# Altium PCB PCB2.PcbDoc (part 2 of 3)
Units mil, origin at the board's own origin, x right, y up, seen from the top; angles counter-clockwise.
Board outline 2598.43 x 2874.02 mil, 2 copper layers (Top Layer, Bottom Layer); 202 components, 116 nets, 598 pads, 319 vias.
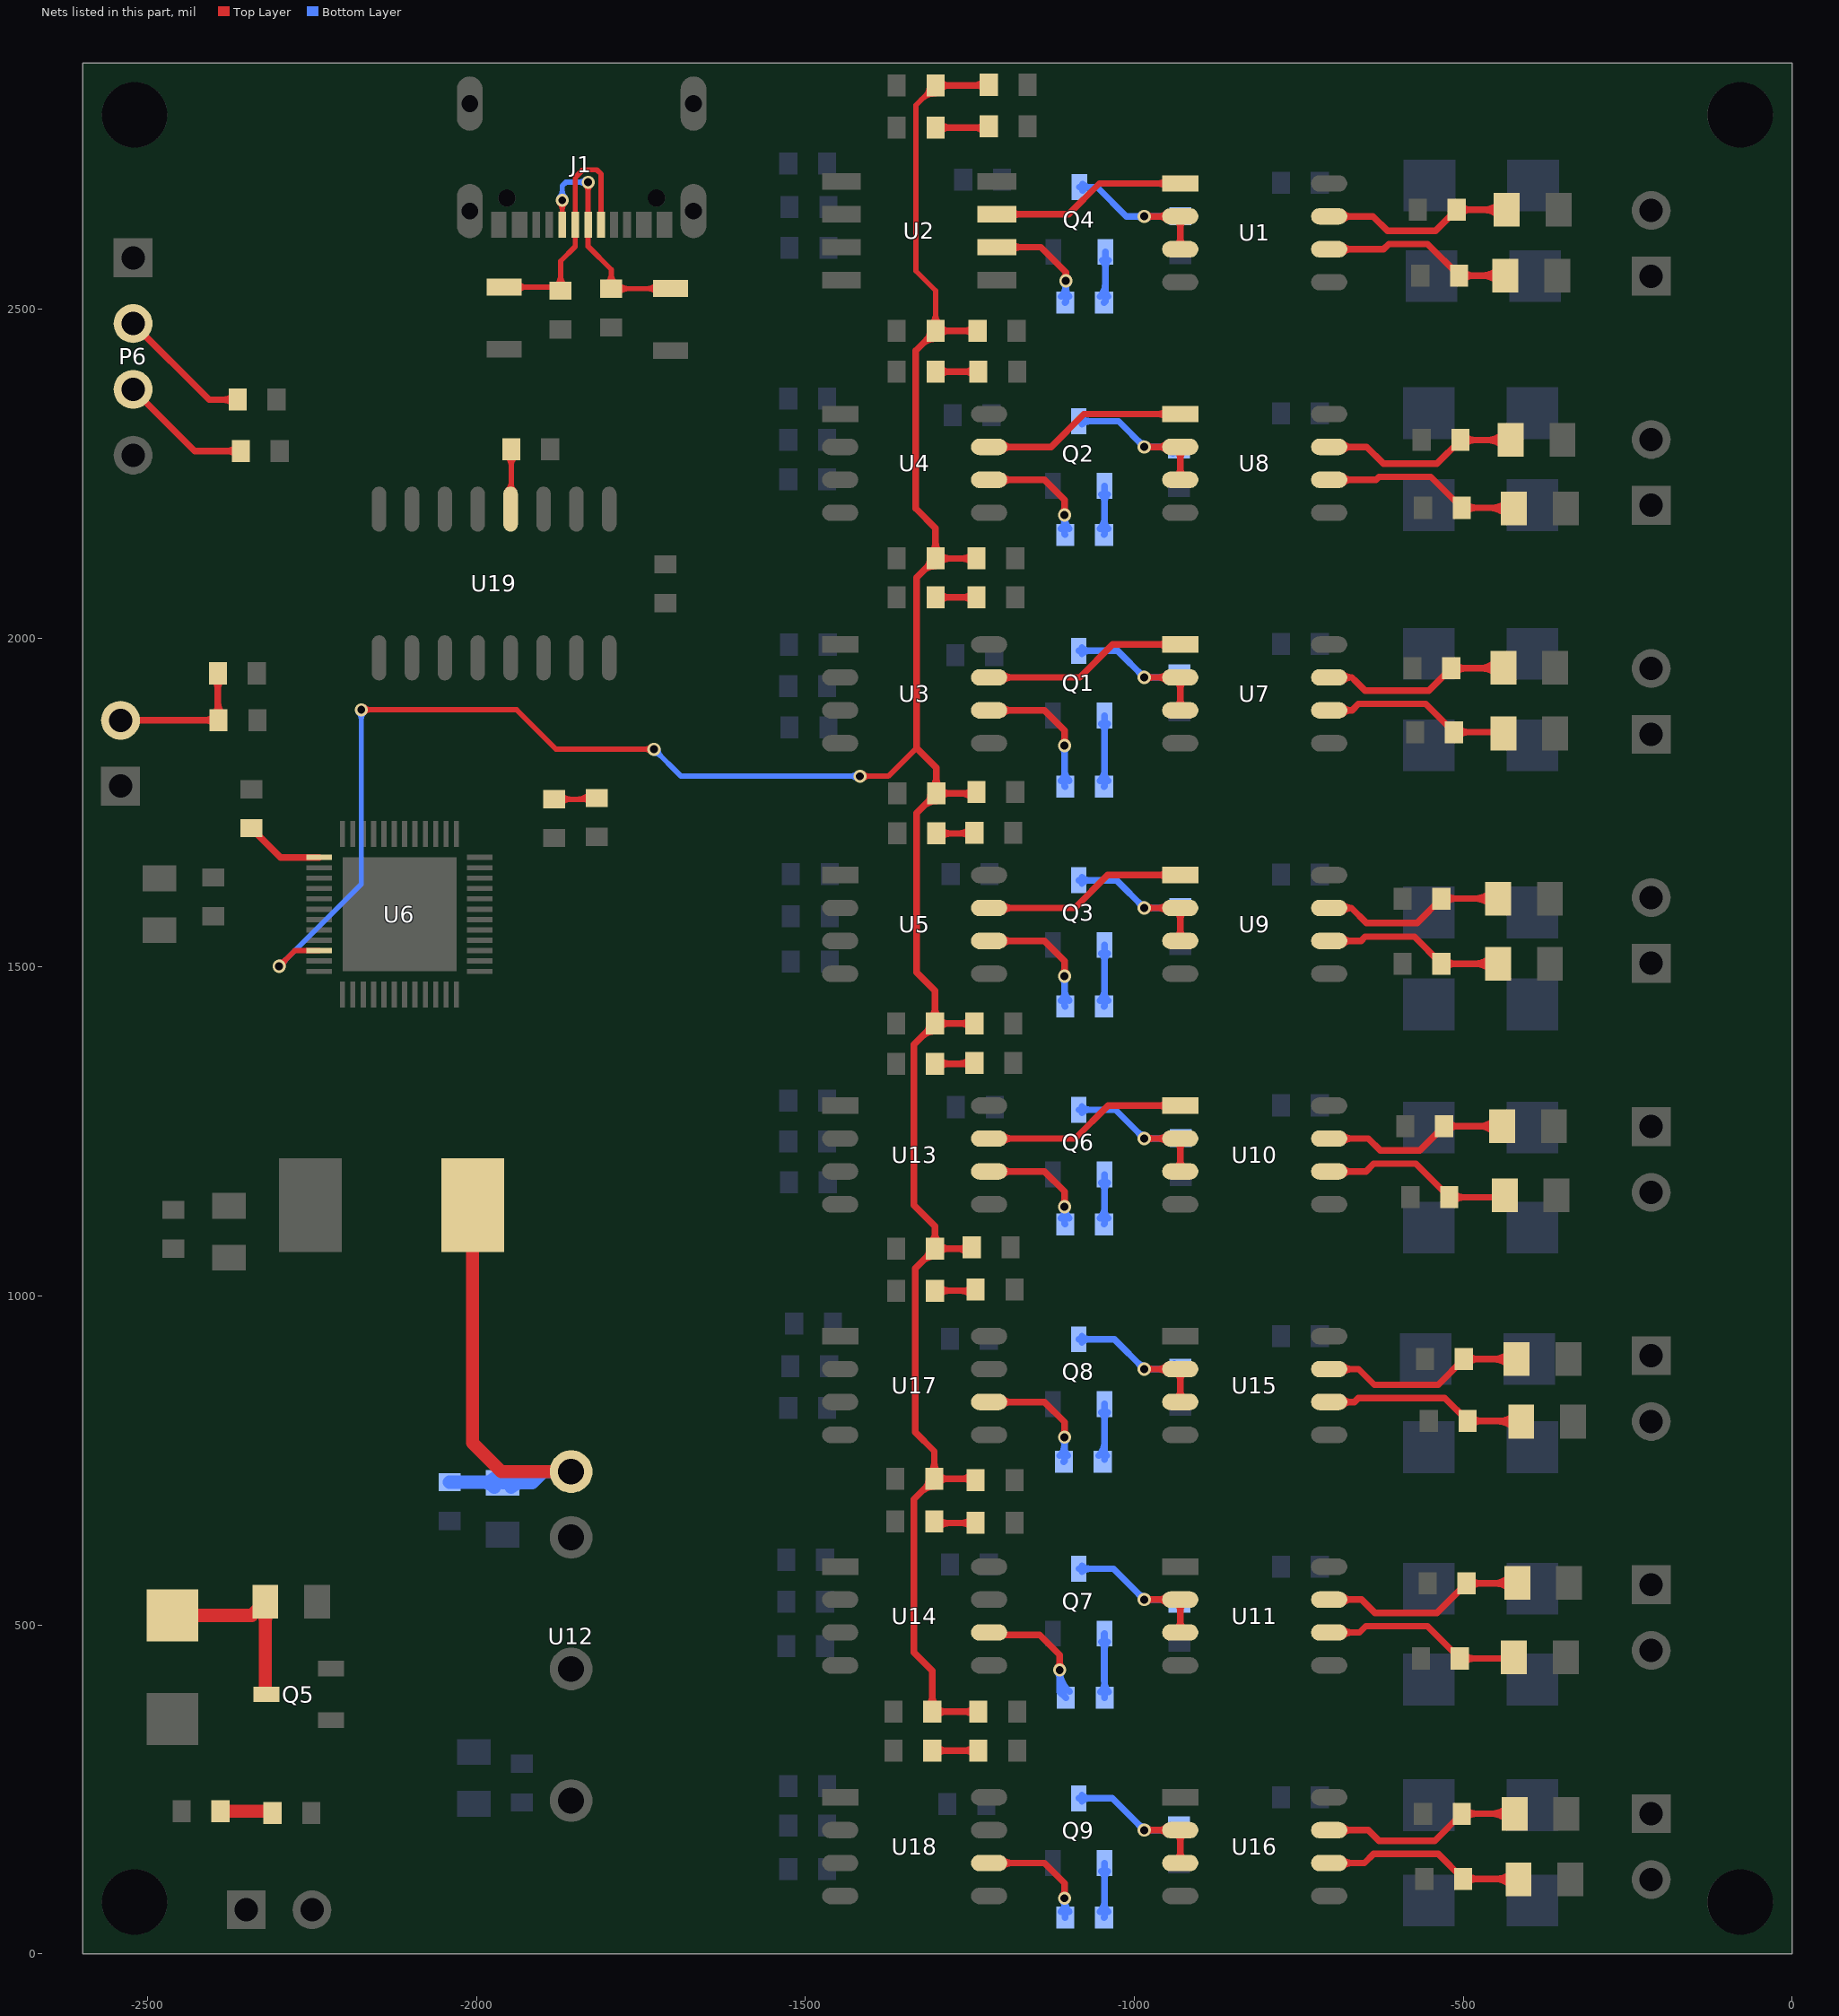
[diagram p2: the nets of this part, all layers, seen from the top]

## Via types
v1: diameter 20, hole 12, Top Layer to Bottom Layer, tented both sides, 315 vias
v2: diameter 30, hole 20, Top Layer to Bottom Layer, tented both sides, 4 vias

## Nets (pads, with @x,y where several pads share a name; then routed paths per layer and width w, separated by ;. In a path a pad name is that pad's centre, name@x,y a point inside that pad or via, vN(x,y) a via of type N, cw(c..) or ccw(c..) an arc to the next point about the centre after c; other vN are vias at no path point) (continued)
INT: LED1.1 LED3.1 LED6.1 LED9.1 LED11.1 LED13.1 LED15.1 LED17.1 R17.1 R20.1 R22.1 R25.1 R54.1 R56.1 R58.1 R60.1 U6.22 | length 5770.2
  Top Layer w8: v1(-2300,1501) -2276.11,1524.89 U6.22@-2239.05,1524.89 ; v1@-2300,1507 ccw(c-2300,1521.49) -2289.76,1511.24 ccw(c-2279.51,1501) v1@-2294,1501 ; v1(-2175,1891) -1939,1891 -1879,1831 v1(-1730,1831) ; v1@-2170.76,1886.76 cw(c-2160.51,1876.51) -2160.51,1891 cw(c-2160.51,1905.49) v1@-2170.76,1895.24 ; v1@-1734.24,1826.76 ccw(c-1744.49,1816.51) -1744.49,1831 ccw(c-1744.49,1845.49) v1@-1734.24,1835.24 ; v1(-1417,1790) -1374,1790 -1331,1833 ; v1@-1412.76,1785.76 cw(c-1402.51,1775.51) -1402.51,1790 cw(c-1402.51,1804.49) v1@-1412.76,1794.24 ; -1323.74,2818.26 cw(c-1302,2796.53) LED9.1@-1302,2827.27 ; -1316.61,2825.39 ccw(c-1328.26,2837.05) LED9.1@-1311.78,2837.05 ; LED1.1@-1308.92,2476.87 ccw(c-1325.61,2493.56) -1302,2493.56 ccw(c-1278.39,2493.56) LED1.1@-1295.08,2476.87 ; LED1.1@-1302,2467 -1302,2528 -1332,2558 -1332,2810 LED9.1@-1302,2840
  Top Layer w10: -1324.03,701.97 cw(c-1304,681.94) LED15.1@-1304,710.27 ; -1323.03,1051.97 cw(c-1303,1031.94) LED13.1@-1303,1060.27 ; -1323.03,1393.97 cw(c-1303,1373.94) LED11.1@-1303,1402.27 ; -1322.03,2100.97 cw(c-1302,2080.94) LED3.1@-1302,2109.27 ; -1322.03,2446.97 cw(c-1302,2426.94) LED1.1@-1302,2455.27 ; -1321.03,1743.97 cw(c-1301,1723.94) LED6.1@-1301,1752.27 ; LED15.1@-1316.9,709.1 ccw(c-1326.85,719.05) LED15.1@-1312.78,719.05 ; LED13.1@-1315.9,1059.1 ccw(c-1325.85,1069.05) LED13.1@-1311.78,1069.05 ; LED11.1@-1315.9,1401.1 ccw(c-1325.85,1411.05) LED11.1@-1311.78,1411.05 ; LED3.1@-1314.9,2108.1 ccw(c-1324.85,2118.05) LED3.1@-1310.78,2118.05 ; LED1.1@-1314.9,2454.1 ccw(c-1324.85,2464.05) LED1.1@-1310.78,2464.05 ; LED6.1@-1313.9,1751.1 ccw(c-1323.85,1761.05) LED6.1@-1309.78,1761.05 ; LED17.1@-1313.21,377.16 ccw(c-1328.2,392.15) -1307,392.15 ccw(c-1285.8,392.15) LED17.1@-1300.79,377.16 ; LED15.1@-1310.21,731.16 ccw(c-1325.2,746.15) -1304,746.15 ccw(c-1282.8,746.15) LED15.1@-1297.79,731.16 ; LED13.1@-1309.21,1081.16 ccw(c-1324.2,1096.15) -1303,1096.15 ccw(c-1281.8,1096.15) LED13.1@-1296.79,1081.16 ; LED11.1@-1309.21,1423.16 ccw(c-1324.2,1438.15) -1303,1438.15 ccw(c-1281.8,1438.15) LED11.1@-1296.79,1423.16 ; LED3.1@-1308.21,2130.16 ccw(c-1323.2,2145.15) -1302,2145.15 ccw(c-1280.8,2145.15) LED3.1@-1295.79,2130.16 ; LED6.1@-1307.21,1773.16 ccw(c-1322.2,1788.15) -1301,1788.15 ccw(c-1279.8,1788.15) LED6.1@-1294.79,1773.16 ; LED9.1@-1302,2840 -1222,2840 R60.1@-1221,2841 ; LED17.1@-1300.79,361.79 cw(c-1285.8,346.8) -1285.8,368 cw(c-1285.8,389.2) LED17.1@-1300.79,374.21 ; LED15.1@-1297.79,715.79 cw(c-1282.8,700.8) -1282.8,722 cw(c-1282.8,743.2) LED15.1@-1297.79,728.21 ; LED13.1@-1296.79,1065.79 cw(c-1281.8,1050.8) -1281.8,1072 cw(c-1281.8,1093.2) LED13.1@-1296.79,1078.21 ; LED11.1@-1296.79,1407.79 cw(c-1281.8,1392.8) -1281.8,1414 cw(c-1281.8,1435.2) LED11.1@-1296.79,1420.21 ; LED3.1@-1295.79,2114.79 cw(c-1280.8,2099.8) -1280.8,2121 cw(c-1280.8,2142.2) LED3.1@-1295.79,2127.21 ; LED1.1@-1295.79,2460.79 cw(c-1280.8,2445.8) -1280.8,2467 cw(c-1280.8,2488.2) LED1.1@-1295.79,2473.21 ; LED9.1@-1295.79,2833.79 cw(c-1280.8,2818.8) -1280.8,2840 cw(c-1280.8,2861.2) LED9.1@-1295.79,2846.21 ; LED6.1@-1294.79,1757.79 cw(c-1279.8,1742.8) -1279.8,1764 cw(c-1279.8,1785.2) LED6.1@-1294.79,1770.21 ; -1270.5,1072 cw(c-1270.5,1047.55) R58.1@-1253.21,1064.84 ; -1265.9,1072 ccw(c-1265.9,1089.94) R58.1@-1253.21,1077.26 ; -1264.5,722 ccw(c-1264.5,746.45) R20.1@-1247.21,729.16 ; -1263.5,1764 cw(c-1263.5,1739.55) R54.1@-1246.21,1756.84 ; -1259.9,722 cw(c-1259.9,704.06) R20.1@-1247.21,716.74 ; -1258.9,1764 ccw(c-1258.9,1781.94) R54.1@-1246.21,1769.26 ; R25.1@-1249.21,1407.79 ccw(c-1264.2,1392.8) -1264.2,1414 ccw(c-1264.2,1435.2) R25.1@-1249.21,1420.21 ; R58.1@-1247,1074 -1249,1072 LED13.1@-1303,1072 ; R17.1@-1246.21,2114.79 ccw(c-1261.2,2099.8) -1261.2,2121 ccw(c-1261.2,2142.2) R17.1@-1246.21,2127.21 ; -1244.61,2840 ccw(c-1244.61,2864.61) R60.1@-1227.21,2847.21 ; R56.1@-1244.21,2460.79 ccw(c-1259.2,2445.8) -1259.2,2467 ccw(c-1259.2,2488.2) R56.1@-1244.21,2473.21 ; R22.1@-1243.21,361.79 ccw(c-1258.2,346.8) -1258.2,368 ccw(c-1258.2,389.2) R22.1@-1243.21,374.21 ; R25.1@-1243,1414 LED11.1@-1303,1414 ; R20.1@-1241,720 -1243,722 LED15.1@-1304,722 ; R54.1@-1240,1766 -1242,1764 LED6.1@-1301,1764 ; R17.1@-1240,2121 LED3.1@-1302,2121 ; -1239.78,2840 cw(c-1239.78,2822.22) R60.1@-1227.21,2834.79 ; R56.1@-1238,2467 LED1.1@-1302,2467 -1332,2437 -1332,2197 -1302,2167 LED3.1@-1302,2121 ; R22.1@-1237,368 LED17.1@-1307,368 -1307,430 -1335,458 -1335,691 LED15.1@-1304,722 ; LED15.1@-1304,722 -1304,764 -1333,793 -1333,1042 LED13.1@-1303,1072 ; LED13.1@-1303,1072 -1303,1106 -1335,1138 -1335,1382 LED11.1@-1303,1414 ; LED11.1@-1303,1414 -1303,1464 -1331,1492 -1331,1734 LED6.1@-1301,1764 ; LED3.1@-1302,2121 -1331,2092 -1331,1833 -1301,1803 LED6.1@-1301,1764
  Bottom Layer w8: v1(-2300,1501) -2175,1626 v1(-2175,1891) ; v1@-2300,1507 ccw(c-2300,1521.49) -2289.76,1511.24 ccw(c-2279.51,1501) v1@-2294,1501 ; v1@-2179.24,1886.76 cw(c-2189.49,1876.51) -2175,1876.51 cw(c-2160.51,1876.51) v1@-2170.76,1886.76 ; v1@-1730,1825 cw(c-1730,1810.51) -1719.76,1820.76 cw(c-1709.51,1831) v1@-1724,1831 ; v1(-1730,1831) -1689,1790 v1(-1417,1790) ; v1@-1421.24,1785.76 ccw(c-1431.49,1775.51) -1431.49,1790 ccw(c-1431.49,1804.49) v1@-1421.24,1794.24
NetC15_2: C15.2 U6.13 | length 132.4
  Top Layer w10: C15.2@-2342,1710.94 -2309.9,1678.84 ; -2302.06,1671 -2309.9,1678.84 ; U6.13@-2239.05,1666.61 -2297.67,1666.61 -2309.9,1678.84
NetC30_1: C30.1 U19.4 | length 155
  Top Layer w8: C30.1@-1953.92,2277.13 cw(c-1970.61,2260.44) -1947,2260.44 cw(c-1923.39,2260.44) C30.1@-1940.08,2277.13 ; U19.4@-1952.97,2224.38 ccw(c-1967.37,2238.79) -1947,2238.79 ; U19.4@-1948,2196.09 -1947,2197.09 C30.1@-1947,2287 ; -1947,2233.96 ccw(c-1933.46,2233.96) U19.4@-1943.03,2224.38
NetC65_1: C65.1 C66.1 L4.2 U12.1 | length 795.1
  Top Layer w20: L4.2@-2005.85,1138 -2005.85,776.85 -1962,733 U12.1@-1856,733
  Bottom Layer w20: C66.1@-2041,717 -1961,717 C65.1@-1960,716 -1915,716 -1898,733 U12.1@-1856,733 ; -1991.7,717 cw(c-1991.7,690.2) C65.1@-1972.75,709.15 ; -1986.87,717 ccw(c-1986.87,736.97) C65.1@-1972.75,722.85 ; C65.1@-1947.25,709.15 cw(c-1930.71,692.62) -1930.71,716 cw(c-1930.71,739.38) C65.1@-1947.25,722.85
NetC67_2: C67.2 R16.1 | length 80.2
  Top Layer w20: R16.1@-2389,217 -2313.06,217 C67.2@-2310.06,214
NetD9_2: D9.2 F2.1 Q5.3 | length 327.5
  Top Layer w20: D9.2@-2462,514.48 -2341.52,514.48 F2.1@-2321,535 -2321,395.94 Q5.3@-2319.43,394.37 ; F2.1@-2327.85,522.25 cw(c-2344.38,505.71) -2321,505.71 cw(c-2297.62,505.71) F2.1@-2314.15,522.25
NetD10_2: D10.2 J1.A7 J1.B7 R33.2 | length 464.2
  Top Layer w8: D10.2@-1958,2533.49 -1877.43,2533.49 R33.2@-1872,2528.06 -1872,2573 -1849.84,2595.16 J1.A7@-1849.84,2628 -1849.84,2700.03 -1838.03,2711.84 -1816.84,2711.84 -1810.47,2705.47 J1.B7@-1810.47,2628 ; D10.2@-1938,2527.27 cw(c-1922.99,2512.25) -1922.99,2533.49 cw(c-1922.99,2554.72) D10.2@-1938,2539.71 ; R33.2@-1878.92,2534.97 ccw(c-1895.61,2551.66) -1872,2551.66 ccw(c-1848.39,2551.66) R33.2@-1865.08,2534.97
NetD11_2: D11.2 J1.A6 J1.B6 R34.2 | length 566.1
  Top Layer w8: v1@-1873.77,2661.23 cw(c-1884.01,2650.99) -1869.53,2650.99 cw(c-1855.04,2650.99) v1@-1865.28,2661.23 ; J1.B6@-1869.53,2628 v1(-1869.53,2665.47) ; v1@-1834.4,2688.6 cw(c-1844.64,2678.36) -1830.16,2678.36 cw(c-1815.67,2678.36) v1@-1825.91,2688.6 ; v1(-1830.16,2692.84) J1.A6@-1830.16,2628 -1830.16,2595.16 -1795,2560 R34.2@-1795,2531.06 -1705.43,2531.06 D11.2@-1705,2531.49 ; R34.2@-1801.92,2537.97 ccw(c-1818.61,2554.66) -1795,2554.66 ccw(c-1771.39,2554.66) R34.2@-1788.08,2537.97 ; R34.2@-1785.13,2524.14 cw(c-1768.44,2507.45) -1768.44,2531.06 cw(c-1768.44,2554.66) R34.2@-1785.13,2537.97 ; -1741.06,2531.06 ccw(c-1741.06,2553.77) D11.2@-1725,2537.71 ; -1738.97,2531.06 cw(c-1738.97,2511.3) D11.2@-1725,2525.27
  Bottom Layer w8: v1@-1873.77,2669.72 ccw(c-1884.01,2679.96) -1869.53,2679.96 ccw(c-1855.04,2679.96) v1@-1865.28,2669.72 ; v1(-1869.53,2665.47) -1869.53,2687.47 -1864.16,2692.84 v1(-1830.16,2692.84) ; v1@-1834.4,2688.6 ccw(c-1844.64,2678.36) -1844.64,2692.84 ccw(c-1844.64,2707.33) v1@-1834.4,2697.09
NetF1_2: F1.2 R19.2 U1.7 | length 409.7
  Top Layer w10: U1.7@-703.62,2641 -637,2641 -615,2619 -541.94,2619 R19.2@-509.94,2651 F1.2@-433.74,2651 ; U1.7@-683.32,2635.7 cw(c-670.52,2622.89) -670.52,2641 cw(c-670.52,2659.11) U1.7@-683.32,2646.3 ; R19.2@-503.74,2644.79 cw(c-488.75,2629.8) -488.75,2651 cw(c-488.75,2672.2) R19.2@-503.74,2657.21 ; F1.2@-444.12,2640.62 ccw(c-469.19,2615.55) -469.19,2651 ccw(c-469.19,2686.45) F1.2@-444.12,2661.38
NetF3_2: F3.2 R1.2 U7.7 | length 403.7
  Top Layer w10: U7.7@-703.62,1940.14 -669.14,1940.14 -663.5,1934.5 -649,1920 -551.94,1920 R1.2@-517.94,1954 F3.2@-439.74,1954 ; U7.7@-683.32,1934.84 cw(c-670.52,1922.04) -670.52,1940.14 cw(c-670.52,1958.25) U7.7@-683.32,1945.45 ; R1.2@-511.74,1947.79 cw(c-496.75,1932.8) -496.75,1954 cw(c-496.75,1975.2) R1.2@-511.74,1960.21 ; -476.61,1954 ccw(c-476.61,1992.87) F3.2@-449.12,1965.38 ; -471.78,1954 cw(c-471.78,1921.96) F3.2@-449.12,1944.62
NetF4_2: F4.2 R6.1 U1.6 | length 408.5
  Top Layer w10: U1.6@-703.62,2591 -621,2591 -613,2599 -554,2599 R6.1@-506,2551 F4.2@-435.74,2551 ; U1.6@-683.32,2585.7 cw(c-670.52,2572.89) -670.52,2591 cw(c-670.52,2609.11) U1.6@-683.32,2596.3 ; R6.1@-499.79,2544.79 cw(c-484.8,2529.8) -484.8,2551 cw(c-484.8,2572.2) R6.1@-499.79,2557.21 ; F4.2@-446.12,2540.62 ccw(c-471.19,2515.55) -471.19,2551 ccw(c-471.19,2586.45) F4.2@-446.12,2561.38
NetF5_2: F5.2 R7.1 U7.6 | length 346.5
  Top Layer w10: U7.6@-703.62,1890.14 -668.86,1890.14 -659,1900 -557,1900 R7.1@-514,1857 F5.2@-440.74,1857 ; U7.6@-683.32,1884.84 cw(c-670.52,1872.04) -670.52,1890.14 cw(c-670.52,1908.25) U7.6@-683.32,1895.45 ; R7.1@-507.79,1850.79 cw(c-492.8,1835.8) -492.8,1857 cw(c-492.8,1878.2) R7.1@-507.79,1863.21
NetF6_2: F6.2 R8.2 U8.7 | length 418.8
  Top Layer w10: U8.7@-703.62,2290.57 -646.57,2290.57 -621,2265 -539.94,2265 R8.2@-503.94,2301 F6.2@-427.74,2301 ; U8.7@-683.32,2285.27 cw(c-670.52,2272.46) -670.52,2290.57 cw(c-670.52,2308.68) U8.7@-683.32,2295.87 ; R8.2@-497.74,2294.79 cw(c-482.75,2279.8) -482.75,2301 cw(c-482.75,2322.2) R8.2@-497.74,2307.21 ; F6.2@-438.12,2290.62 ccw(c-463.19,2265.55) -463.19,2301 ccw(c-463.19,2336.45) F6.2@-438.12,2311.38
NetF7_2: F7.2 R9.2 U9.7 | length 399
  Top Layer w10: U9.7@-703.62,1589.71 -669.71,1589.71 -647,1567 -569.94,1567 R9.2@-532.94,1604 F7.2@-446.74,1604 ; U9.7@-683.32,1584.41 cw(c-670.52,1571.61) -670.52,1589.71 cw(c-670.52,1607.82) U9.7@-683.32,1595.02 ; R9.2@-526.74,1597.79 cw(c-511.75,1582.8) -511.75,1604 cw(c-511.75,1625.2) R9.2@-526.74,1610.21 ; F7.2@-457.12,1593.62 ccw(c-482.19,1568.55) -482.19,1604 ccw(c-482.19,1639.45) F7.2@-457.12,1614.38
NetF8_2: F8.2 R14.1 U8.6 | length 418.6
  Top Layer w10: U8.6@-703.62,2240.57 -632.43,2240.57 -628,2245 -549,2245 R14.1@-502,2198 F8.2@-423.74,2198 ; U8.6@-683.32,2235.27 cw(c-670.52,2222.46) -670.52,2240.57 cw(c-670.52,2258.68) U8.6@-683.32,2245.87 ; R14.1@-495.79,2191.79 cw(c-480.8,2176.8) -480.8,2198 cw(c-480.8,2219.2) R14.1@-495.79,2204.21 ; -460.61,2198 cw(c-460.61,2159.13) F8.2@-433.12,2186.62 ; -455.78,2198 ccw(c-455.78,2230.04) F8.2@-433.12,2207.38
NetF9_2: F9.2 R15.1 U9.6 | length 393.9
  Top Layer w10: U9.6@-703.62,1539.71 -655.29,1539.71 -649,1546 -574,1546 R15.1@-533,1505 F9.2@-446.74,1505 ; U9.6@-683.32,1534.41 cw(c-670.52,1521.61) -670.52,1539.71 cw(c-670.52,1557.82) U9.6@-683.32,1545.02 ; R15.1@-526.79,1498.79 cw(c-511.8,1483.8) -511.8,1505 cw(c-511.8,1526.2) R15.1@-526.79,1511.21 ; F9.2@-457.12,1494.62 ccw(c-482.19,1469.55) -482.19,1505 ccw(c-482.19,1540.45) F9.2@-457.12,1515.38
NetF10_2: F10.2 R37.2 U10.7 | length 403.2
  Top Layer w10: U10.7@-703.62,1239.29 -644.29,1239.29 -626,1221 -565.94,1221 R37.2@-528.94,1258 F10.2@-440.74,1258 ; U10.7@-683.32,1233.98 cw(c-670.52,1221.18) -670.52,1239.29 cw(c-670.52,1257.39) U10.7@-683.32,1244.59 ; R37.2@-522.74,1251.79 cw(c-507.75,1236.8) -507.75,1258 cw(c-507.75,1279.2) R37.2@-522.74,1264.21 ; F10.2@-451.12,1247.62 ccw(c-476.19,1222.55) -476.19,1258 ccw(c-476.19,1293.45) F10.2@-451.12,1268.38
NetF11_2: F11.2 R38.2 U11.7 | length 430.8
  Top Layer w10: U11.7@-703.62,538.43 -654.43,538.43 -634,518 -539.94,518 R38.2@-494.94,563 -418.74,563 F11.2@-417.74,564 ; U11.7@-683.32,533.13 cw(c-670.52,520.32) -670.52,538.43 cw(c-670.52,556.54) U11.7@-683.32,543.73 ; R38.2@-488.74,556.79 cw(c-473.75,541.8) -473.75,563 cw(c-473.75,584.2) R38.2@-488.74,569.21 ; -455.61,563 ccw(c-455.61,601.87) F11.2@-428.12,574.38 ; -450.78,563 cw(c-450.78,530.96) F11.2@-428.12,553.62
NetF12_2: F12.2 R68.1 U10.6 | length 355.8
  Top Layer w10: U10.6@-703.62,1189.29 -647.71,1189.29 -636,1201 -572,1201 R68.1@-521,1150 -439.74,1150 F12.2@-436.74,1153 ; U10.6@-683.32,1183.98 cw(c-670.52,1171.18) -670.52,1189.29 cw(c-670.52,1207.39) U10.6@-683.32,1194.59 ; R68.1@-514.79,1143.79 cw(c-499.8,1128.8) -499.8,1150 cw(c-499.8,1171.2) R68.1@-514.79,1156.21
NetF13_2: F13.2 R44.1 U11.6 | length 367.7
  Top Layer w10: U11.6@-703.62,488.43 -657.57,488.43 -648,498 -554,498 R44.1@-505,449 -424.74,449 F13.2@-422.74,451 ; U11.6@-683.32,483.13 cw(c-670.52,470.32) -670.52,488.43 cw(c-670.52,506.54) U11.6@-683.32,493.73 ; R44.1@-498.79,442.79 cw(c-483.8,427.8) -483.8,449 cw(c-483.8,470.2) R44.1@-498.79,455.21
NetF14_2: F14.2 R45.2 U15.7 | length 428.3
  Top Layer w10: U15.7@-703.62,888.86 -658.86,888.86 -635,865 -537.94,865 R45.2@-498.94,904 F14.2@-418.74,904 ; U15.7@-683.32,883.55 cw(c-670.52,870.75) -670.52,888.86 cw(c-670.52,906.96) U15.7@-683.32,894.16 ; R45.2@-492.74,897.79 cw(c-477.75,882.8) -477.75,904 cw(c-477.75,925.2) R45.2@-492.74,910.21 ; F14.2@-429.12,893.62 ccw(c-454.19,868.55) -454.19,904 ccw(c-454.19,939.45) F14.2@-429.12,914.38
NetF15_2: F15.2 R46.2 U16.7 | length 422.9
  Top Layer w10: U16.7@-703.62,188 -644,188 -628,172 -542.94,172 R46.2@-501.94,213 F15.2@-421.74,213 ; U16.7@-683.32,182.7 cw(c-670.52,169.89) -670.52,188 cw(c-670.52,206.11) U16.7@-683.32,193.3 ; R46.2@-495.74,206.79 cw(c-480.75,191.8) -480.75,213 cw(c-480.75,234.2) R46.2@-495.74,219.21 ; F15.2@-432.12,202.62 ccw(c-457.19,177.55) -457.19,213 ccw(c-457.19,248.45) F15.2@-432.12,223.38
NetF16_2: F16.2 R51.1 U15.6 | length 426.8
  Top Layer w10: U15.6@-703.62,838.86 -665.14,838.86 -659,845 -528,845 R51.1@-493,810 -412.74,810 F16.2@-411.74,809 ; U15.6@-683.32,833.55 cw(c-670.52,820.75) -670.52,838.86 cw(c-670.52,856.96) U15.6@-683.32,844.16 ; R51.1@-486.79,803.79 cw(c-471.8,788.8) -471.8,810 cw(c-471.8,831.2) R51.1@-486.79,816.21 ; -449.61,810 cw(c-449.61,771.13) F16.2@-422.12,798.62 ; -444.78,810 ccw(c-444.78,842.04) F16.2@-422.12,819.38
NetF17_2: F17.2 R52.1 U16.6 | length 427.3
  Top Layer w10: U16.6@-703.62,138 -650,138 -636,152 -538,152 R52.1@-500,114 -416.74,114 F17.2@-415.74,113 ; U16.6@-683.32,132.7 cw(c-670.52,119.89) -670.52,138 cw(c-670.52,156.11) U16.6@-683.32,143.3 ; R52.1@-493.79,107.79 cw(c-478.8,92.8) -478.8,114 cw(c-478.8,135.2) R52.1@-493.79,120.21 ; -453.61,114 cw(c-453.61,75.13) F17.2@-426.12,102.62 ; -448.78,114 ccw(c-448.78,146.04) F17.2@-426.12,123.38
NetLED2_1: LED2.1 R18.1 | length 131.6
  Top Layer w10: LED2.1@-1302,2405 R18.1@-1237,2405 ; LED2.1@-1295.79,2398.79 cw(c-1280.8,2383.8) -1280.8,2405 cw(c-1280.8,2426.2) LED2.1@-1295.79,2411.21 ; R18.1@-1243.21,2398.79 ccw(c-1258.2,2383.8) -1258.2,2405 ccw(c-1258.2,2426.2) R18.1@-1243.21,2411.21
NetLED4_1: LED4.1 R21.1 | length 128.6
  Top Layer w10: LED4.1@-1302,2062 R21.1@-1240,2062 ; LED4.1@-1295.79,2055.79 cw(c-1280.8,2040.8) -1280.8,2062 cw(c-1280.8,2083.2) LED4.1@-1295.79,2068.21 ; R21.1@-1246.21,2055.79 ccw(c-1261.2,2040.8) -1261.2,2062 ccw(c-1261.2,2083.2) R21.1@-1246.21,2068.21
NetLED5_1: LED5.1 R27.1 | length 148.4
  Top Layer w10: LED5.1@-1302,2776 -1223,2776 R27.1@-1221,2778 ; LED5.1@-1295.79,2769.79 cw(c-1280.8,2754.8) -1280.8,2776 cw(c-1280.8,2797.2) LED5.1@-1295.79,2782.21 ; -1244.5,2776 cw(c-1244.5,2751.55) R27.1@-1227.21,2768.84 ; -1239.9,2776 ccw(c-1239.9,2793.94) R27.1@-1227.21,2781.26
NetLED7_1: LED7.1 R23.1 | length 125
  Top Layer w10: LED7.1@-1301,1703 -1244,1703 R23.1@-1243,1704 ; LED7.1@-1294.79,1696.79 cw(c-1279.8,1681.8) -1279.8,1703 cw(c-1279.8,1724.2) LED7.1@-1294.79,1709.21 ; -1266.61,1703 ccw(c-1266.61,1727.61) R23.1@-1249.21,1710.21 ; -1261.78,1703 cw(c-1261.78,1685.22) R23.1@-1249.21,1697.79
NetLED8_1: LED8.1 R24.1 | length 140
  Top Layer w8: LED8.1@-1882,1755 -1819,1755 R24.1@-1817,1757 ; LED8.1@-1872.13,1748.08 cw(c-1855.44,1731.39) -1855.44,1755 cw(c-1855.44,1778.61) LED8.1@-1872.13,1761.92 ; -1848.39,1755 ccw(c-1848.39,1785.44) R24.1@-1826.87,1763.92 ; -1838.73,1755 cw(c-1838.73,1738.22) R24.1@-1826.87,1750.08
NetLED10_1: LED10.1 R53.1 | length 127
  Top Layer w10: LED10.1@-1303,1353 -1244,1353 R53.1@-1243,1354 ; LED10.1@-1296.79,1346.79 cw(c-1281.8,1331.8) -1281.8,1353 cw(c-1281.8,1374.2) LED10.1@-1296.79,1359.21 ; -1266.61,1353 ccw(c-1266.61,1377.61) R53.1@-1249.21,1360.21 ; -1261.78,1353 cw(c-1261.78,1335.22) R53.1@-1249.21,1347.79
NetLED12_1: LED12.1 R55.1 | length 129.4
  Top Layer w10: LED12.1@-1303,1008 -1243,1008 R55.1@-1241,1010 ; LED12.1@-1296.79,1001.79 cw(c-1281.8,986.8) -1281.8,1008 cw(c-1281.8,1029.2) LED12.1@-1296.79,1014.21 ; -1264.5,1008 cw(c-1264.5,983.55) R55.1@-1247.21,1000.84 ; -1259.9,1008 ccw(c-1259.9,1025.94) R55.1@-1247.21,1013.26
NetLED14_1: LED14.1 R57.1 | length 130.4
  Top Layer w10: LED14.1@-1304,657 -1302,655 R57.1@-1241,655 ; LED14.1@-1297.79,647.84 cw(c-1280.5,630.55) -1280.5,655 ; LED14.1@-1297.79,660.26 ccw(c-1285.1,672.94) -1285.1,655 ; R57.1@-1247.21,648.79 ccw(c-1262.2,633.8) -1262.2,655 ccw(c-1262.2,676.2) R57.1@-1247.21,661.21
NetLED16_1: LED16.1 R59.1 | length 136.6
  Top Layer w10: LED16.1@-1307,309 R59.1@-1237,309 ; LED16.1@-1300.79,302.79 cw(c-1285.8,287.8) -1285.8,309 cw(c-1285.8,330.2) LED16.1@-1300.79,315.21 ; R59.1@-1243.21,302.79 ccw(c-1258.2,287.8) -1258.2,309 ccw(c-1258.2,330.2) R59.1@-1243.21,315.21
NetP6_2: P6.2 R35.2 | length 240.1
  Top Layer w10: P6.2@-2522,2478 -2406.35,2362.35 R35.2@-2363.06,2362.35 ; R35.2@-2369.26,2356.14 ccw(c-2384.25,2341.15) -2384.25,2362.35 ccw(c-2384.25,2383.54) R35.2@-2369.26,2368.55
NetP6_3: P6.3 R36.2 | length 236
  Top Layer w10: P6.3@-2522,2378 -2428.35,2284.35 R36.2@-2358.06,2284.35 ; R36.2@-2364.26,2278.14 ccw(c-2379.25,2263.15) -2379.25,2284.35 ccw(c-2379.25,2305.54) R36.2@-2364.26,2290.55
NetP7_2: P7.2 R29.2 R32.1 | length 320.7
  Top Layer w10: P7.2@-2541,1875 R32.1@-2392.35,1875 ; -2414.03,1875 ccw(c-2414.03,1897.38) R32.1@-2398.21,1881.55 ; -2412.36,1875 cw(c-2412.36,1854.99) R32.1@-2398.21,1869.14 ; R29.2@-2399.26,1937.19 cw(c-2414.25,1922.2) -2393.06,1922.2 cw(c-2371.86,1922.2) R29.2@-2386.85,1937.19 ; R32.1@-2398.21,1884.51 ccw(c-2410.65,1896.95) -2393.06,1896.95 ; -2393.06,1902.04 ccw(c-2368.26,1902.04) R32.1@-2385.79,1884.51 ; R29.2@-2393.06,1946.35 -2393.06,1875.71 R32.1@-2392.35,1875 ; R32.1@-2392,1875.35 R32.1@-2392.35,1875
NetQ1_1: Q1.1 R61.2 | length 167.8
  Bottom Layer w10: R61.2@-1052.15,1783.16 ccw(c-1069.42,1800.43) -1045,1800.43 ; Q1.1@-1049.82,1869.6 cw(c-1061.44,1857.97) -1045,1857.97 cw(c-1028.56,1857.97) Q1.1@-1040.18,1869.6 ; R61.2@-1045.94,1774 -1045,1774.94 Q1.1@-1045,1882.29 ; -1045,1795.87 ccw(c-1027.03,1795.87) R61.2@-1039.74,1783.16
NetQ1_3: Q1.3 R63.1 U7.2 U7.3 | length 445.4
  Top Layer w10: v1(-984.71,1940.14) U7.2@-930,1940.14 U7.3@-930,1890.14 ; v1@-981.18,1936.61 cw(c-972.64,1928.07) -972.64,1940.14 cw(c-972.64,1952.21) v1@-981.18,1943.68 ; U7.2@-950.3,1934.84 ccw(c-963.11,1922.04) -963.11,1940.14 ccw(c-963.11,1958.25) U7.2@-950.3,1945.45 ; U7.3@-935.3,1895.45 ccw(c-948.11,1908.25) -930,1908.25 ccw(c-911.89,1908.25) U7.3@-924.7,1895.45 ; U7.2@-935.3,1934.84 cw(c-948.11,1922.04) -930,1922.04 cw(c-911.89,1922.04) U7.2@-924.7,1934.84
  Bottom Layer w10: Q1.3@-1084.37,1980.71 -1025.28,1980.71 v1(-984.71,1940.14) -936.86,1940.14 R63.1@-931,1946 ; Q1.3@-1079.55,1975.89 cw(c-1067.93,1964.27) -1067.93,1980.71 cw(c-1067.93,1997.15) Q1.3@-1079.55,1985.53 ; v1@-989.71,1940.14 ccw(c-1001.79,1940.14) -993.25,1948.68 ccw(c-984.71,1957.21) v1@-984.71,1945.14 ; v1@-981.18,1936.61 cw(c-972.64,1928.07) -972.64,1940.14 cw(c-972.64,1952.21) v1@-981.18,1943.68
NetQ2_1: Q2.1 R64.2 | length 133.7
  Bottom Layer w10: R64.2@-1052.15,2166.16 ccw(c-1069.42,2183.43) -1045,2183.43 ; Q2.1@-1049.82,2218.45 cw(c-1061.44,2206.83) -1045,2206.83 cw(c-1028.56,2206.83) Q2.1@-1040.18,2218.45 ; R64.2@-1045.94,2157 -1045,2157.94 Q2.1@-1045,2231.14 ; -1045,2178.87 ccw(c-1027.03,2178.87) R64.2@-1039.74,2166.16
NetQ2_3: Q2.3 R66.1 U8.2 U8.3 | length 469
  Top Layer w10: v1(-984.71,2290.57) U8.2@-930,2290.57 U8.3@-930,2240.57 ; v1@-981.18,2287.04 cw(c-972.64,2278.5) -972.64,2290.57 cw(c-972.64,2302.64) v1@-981.18,2294.11 ; U8.2@-950.3,2285.27 ccw(c-963.11,2272.46) -963.11,2290.57 ccw(c-963.11,2308.68) U8.2@-950.3,2295.87 ; U8.3@-935.3,2245.87 ccw(c-948.11,2258.68) -930,2258.68 ccw(c-911.89,2258.68) U8.3@-924.7,2245.87 ; U8.2@-935.3,2285.27 cw(c-948.11,2272.46) -930,2272.46 cw(c-911.89,2272.46) U8.2@-924.7,2285.27
  Bottom Layer w10: Q2.3@-1084.37,2329.57 -1023.71,2329.57 v1(-984.71,2290.57) -935.57,2290.57 R66.1@-932,2287 ; Q2.3@-1079.55,2324.75 cw(c-1067.93,2313.12) -1067.93,2329.57 cw(c-1067.93,2346.01) Q2.3@-1079.55,2334.38 ; v1@-989.71,2290.57 ccw(c-1001.79,2290.57) -993.25,2299.11 ccw(c-984.71,2307.64) v1@-984.71,2295.57 ; v1@-981.18,2287.04 cw(c-972.64,2278.5) -972.64,2290.57 cw(c-972.64,2302.64) v1@-981.18,2294.11 ; -964.77,2290.57 cw(c-964.77,2257.18) R66.1@-941.16,2280.79
NetQ3_1: Q3.1 R65.2 | length 152.9
  Bottom Layer w10: R65.2@-1052.15,1449.16 ccw(c-1069.42,1466.43) -1045,1466.43 ; Q3.1@-1049.82,1520.74 cw(c-1061.44,1509.11) -1045,1509.11 cw(c-1028.56,1509.11) Q3.1@-1040.18,1520.74 ; R65.2@-1045.94,1440 -1045,1440.94 Q3.1@-1045,1533.43 ; -1045,1461.87 ccw(c-1027.03,1461.87) R65.2@-1039.74,1449.16
NetQ3_3: Q3.3 R67.1 U9.2 U9.3 | length 478.4
  Top Layer w10: v1(-984.71,1589.71) U9.2@-930,1589.71 U9.3@-930,1539.71 ; v1@-981.18,1586.18 cw(c-972.64,1577.64) -972.64,1589.71 cw(c-972.64,1601.79) v1@-981.18,1593.25 ; U9.2@-950.3,1584.41 ccw(c-963.11,1571.61) -963.11,1589.71 ccw(c-963.11,1607.82) U9.2@-950.3,1595.02 ; U9.3@-935.3,1545.02 ccw(c-948.11,1557.82) -930,1557.82 ccw(c-911.89,1557.82) U9.3@-924.7,1545.02 ; U9.2@-935.3,1584.41 cw(c-948.11,1571.61) -930,1571.61 cw(c-911.89,1571.61) U9.2@-924.7,1584.41
  Bottom Layer w10: Q3.3@-1084.37,1631.85 -1026.85,1631.85 v1(-984.71,1589.71) -931.29,1589.71 R67.1@-930,1591 ; Q3.3@-1079.55,1627.04 cw(c-1067.93,1615.41) -1067.93,1631.85 cw(c-1067.93,1648.3) Q3.3@-1079.55,1636.67 ; v1@-989.71,1589.71 ccw(c-1001.79,1589.71) -993.25,1598.25 ccw(c-984.71,1606.79) v1@-984.71,1594.71 ; v1@-981.18,1586.18 cw(c-972.64,1577.64) -972.64,1589.71 cw(c-972.64,1601.79) v1@-981.18,1593.25 ; -957.25,1589.71 ccw(c-957.25,1615.3) R67.1@-939.16,1597.21 ; -951.04,1589.71 cw(c-951.04,1572.91) R67.1@-939.16,1584.79
NetQ4_1: Q4.1 R43.2 | length 136.9
  Bottom Layer w10: R43.2@-1052.15,2519.16 ccw(c-1071.84,2538.84) -1044,2538.84 ; Q4.1@-1048.82,2574.31 cw(c-1060.44,2562.68) -1044,2562.68 cw(c-1027.56,2562.68) Q4.1@-1039.18,2574.31 ; R43.2@-1045.94,2510 -1044,2511.94 Q4.1@-1044,2587 ; -1044,2529.45 ccw(c-1029.44,2529.45) R43.2@-1039.74,2519.16
NetQ4_3: Q4.3 R62.1 U1.2 U1.3 | length 477.8
  Top Layer w10: v1(-984.71,2641) U1.2@-930,2641 U1.3@-930,2591 ; v1@-981.18,2637.46 cw(c-972.64,2628.93) -972.64,2641 cw(c-972.64,2653.07) v1@-981.18,2644.54 ; U1.2@-950.3,2635.7 ccw(c-963.11,2622.89) -963.11,2641 ccw(c-963.11,2659.11) U1.2@-950.3,2646.3 ; U1.3@-935.3,2596.3 ccw(c-948.11,2609.11) -930,2609.11 ccw(c-911.89,2609.11) U1.3@-924.7,2596.3 ; U1.2@-935.3,2635.7 cw(c-948.11,2622.89) -930,2622.89 cw(c-911.89,2622.89) U1.2@-924.7,2635.7
  Bottom Layer w10: Q4.3@-1083.37,2685.43 -1056.43,2685.43 -1012,2641 v1(-984.71,2641) R62.1@-930,2641 ; Q4.3@-1078.55,2680.61 cw(c-1066.93,2668.98) -1066.93,2685.43 cw(c-1066.93,2701.87) Q4.3@-1078.55,2690.24 ; v1@-988.25,2637.46 ccw(c-996.79,2628.93) -996.79,2641 ccw(c-996.79,2653.07) v1@-988.25,2644.54 ; v1@-981.18,2637.46 cw(c-972.64,2628.93) -972.64,2641 cw(c-972.64,2653.07) v1@-981.18,2644.54 ; R62.1@-939.16,2634.79 ccw(c-954.15,2619.81) -954.15,2641 ccw(c-954.15,2662.2) R62.1@-939.16,2647.21
NetQ6_1: Q6.1 R69.2 | length 135.1
  Bottom Layer w10: R69.2@-1052.15,1118.16 ccw(c-1069.42,1135.43) -1045,1135.43 ; Q6.1@-1049.82,1171.88 cw(c-1061.44,1160.25) -1045,1160.25 cw(c-1028.56,1160.25) Q6.1@-1040.18,1171.88 ; R69.2@-1045.94,1109 -1045,1109.94 Q6.1@-1045,1184.57 ; -1045,1130.87 ccw(c-1027.03,1130.87) R69.2@-1039.74,1118.16
NetQ6_3: Q6.3 R71.1 U10.2 U10.3 | length 479.8
  Top Layer w10: v1(-984.71,1239.29) U10.2@-930,1239.29 U10.3@-930,1189.29 ; v1@-981.18,1235.75 cw(c-972.64,1227.21) -972.64,1239.29 cw(c-972.64,1251.36) v1@-981.18,1242.82 ; U10.2@-950.3,1233.98 ccw(c-963.11,1221.18) -963.11,1239.29 ccw(c-963.11,1257.39) U10.2@-950.3,1244.59 ; U10.3@-935.3,1194.59 ccw(c-948.11,1207.39) -930,1207.39 ccw(c-911.89,1207.39) U10.3@-924.7,1194.59 ; U10.2@-935.3,1233.98 cw(c-948.11,1221.18) -930,1221.18 cw(c-911.89,1221.18) U10.2@-924.7,1233.98
  Bottom Layer w10: Q6.3@-1084.37,1283 -1028.43,1283 v1(-984.71,1239.29) -929.71,1239.29 R71.1@-929,1240 ; Q6.3@-1079.55,1278.18 cw(c-1067.93,1266.55) -1067.93,1283 cw(c-1067.93,1299.44) Q6.3@-1079.55,1287.81 ; v1@-989.71,1239.29 ccw(c-1001.79,1239.29) -993.25,1247.82 ccw(c-984.71,1256.36) v1@-984.71,1244.29 ; v1@-981.18,1235.75 cw(c-972.64,1227.21) -972.64,1239.29 cw(c-972.64,1251.36) v1@-981.18,1242.82 ; -954.87,1239.29 ccw(c-954.87,1262.92) R71.1@-938.16,1246.21 ; -951.42,1239.29 cw(c-951.42,1220.53) R71.1@-938.16,1233.79
NetQ7_1: Q7.1 R70.2 | length 255.1
  Bottom Layer w10: R70.2@-1051.15,398.16 ccw(c-1066.01,413.02) -1045,413.02 ; -1045.94,415 -1045.94,485.91 Q7.1@-1045,486.86 -1045,389.06 R70.2@-1044.94,389 ; -1045.94,460.26 cw(c-1026.28,460.26) -1040.18,474.17 ccw(c-1028.56,462.54) -1045,462.54 ccw(c-1061.44,462.54) -1049.82,474.17 cw(c-1059.16,464.82) -1045.94,464.82 ; -1045,413.28 ccw(c-1023.62,413.28) R70.2@-1038.74,398.16
NetQ7_3: Q7.3 R72.1 U11.2 U11.3 | length 448.2
  Top Layer w10: v1(-984.71,538.43) U11.2@-930,538.43 U11.3@-930,488.43 ; v1@-981.18,534.89 cw(c-972.64,526.36) -972.64,538.43 cw(c-972.64,550.5) v1@-981.18,541.96 ; U11.2@-950.3,533.13 ccw(c-963.11,520.32) -963.11,538.43 ccw(c-963.11,556.54) U11.2@-950.3,543.73 ; U11.3@-935.3,493.73 ccw(c-948.11,506.54) -930,506.54 ccw(c-911.89,506.54) U11.3@-924.7,493.73 ; U11.2@-935.3,533.13 cw(c-948.11,520.32) -930,520.32 cw(c-911.89,520.32) U11.2@-924.7,533.13
  Bottom Layer w10: Q7.3@-1084.37,585.28 -1031.57,585.28 v1(-984.71,538.43) -937.43,538.43 R72.1@-931,532 ; Q7.3@-1079.55,580.47 cw(c-1067.93,568.84) -1067.93,585.28 cw(c-1067.93,601.73) Q7.3@-1079.55,590.1 ; v1@-989.71,538.43 ccw(c-1001.79,538.43) -993.25,546.96 ccw(c-984.71,555.5) v1@-984.71,543.43 ; v1@-981.18,534.89 cw(c-972.64,526.36) -972.64,538.43 cw(c-972.64,550.5) v1@-981.18,541.96
NetQ8_1: Q8.1 R73.2 | length 143.9
  Bottom Layer w10: R73.2@-1054.15,757.16 ccw(c-1076.25,779.26) -1045,779.26 ; Q8.1@-1049.82,823.02 cw(c-1061.44,811.4) -1045,811.4 cw(c-1028.56,811.4) Q8.1@-1040.18,823.02 ; R73.2@-1045,750.94 Q8.1@-1045,835.71 ; -1045,765.04 ccw(c-1033.86,765.04) R73.2@-1041.74,757.16
NetQ8_3: Q8.3 R75.1 U15.2 U15.3 | length 480.1
  Top Layer w10: v1(-984.71,888.86) U15.2@-930,888.86 U15.3@-930,838.86 ; v1@-981.18,885.32 cw(c-972.64,876.79) -972.64,888.86 cw(c-972.64,900.93) v1@-981.18,892.39 ; U15.2@-950.3,883.55 ccw(c-963.11,870.75) -963.11,888.86 ccw(c-963.11,906.96) U15.2@-950.3,894.16 ; U15.3@-935.3,844.16 ccw(c-948.11,856.96) -930,856.96 ccw(c-911.89,856.96) U15.3@-924.7,844.16 ; U15.2@-935.3,883.55 cw(c-948.11,870.75) -930,870.75 cw(c-911.89,870.75) U15.2@-924.7,883.55
  Bottom Layer w10: Q8.3@-1084.37,934.14 -1030,934.14 v1(-984.71,888.86) -932.14,888.86 R75.1@-930,891 ; Q8.3@-1079.55,929.32 cw(c-1067.93,917.7) -1067.93,934.14 cw(c-1067.93,950.58) Q8.3@-1079.55,938.96 ; v1@-989.71,888.86 ccw(c-1001.79,888.86) -993.25,897.39 ccw(c-984.71,905.93) v1@-984.71,893.86 ; v1@-981.18,885.32 cw(c-972.64,876.79) -972.64,888.86 cw(c-972.64,900.93) v1@-981.18,892.39 ; -959.32,888.86 ccw(c-959.32,917.37) R75.1@-939.16,897.21 ; -948.97,888.86 cw(c-948.97,874.98) R75.1@-939.16,884.79
NetQ9_1: Q9.1 R74.2 | length 142.5
  Bottom Layer w10: R74.2@-1052.15,64.16 ccw(c-1069.42,81.43) -1045,81.43 ; Q9.1@-1049.82,125.31 cw(c-1061.44,113.68) -1045,113.68 cw(c-1028.56,113.68) Q9.1@-1040.18,125.31 ; R74.2@-1045.94,55 -1045,55.94 Q9.1@-1045,138 ; -1045,76.87 ccw(c-1027.03,76.87) R74.2@-1039.74,64.16
NetQ9_3: Q9.3 R76.1 U16.2 U16.3 | length 448.1
  Top Layer w10: v1(-984.71,188) U16.2@-930,188 U16.3@-930,138 ; v1@-981.18,184.46 cw(c-972.64,175.93) -972.64,188 cw(c-972.64,200.07) v1@-981.18,191.54 ; U16.2@-950.3,182.7 ccw(c-963.11,169.89) -963.11,188 ccw(c-963.11,206.11) U16.2@-950.3,193.3 ; U16.3@-935.3,143.3 ccw(c-948.11,156.11) -930,156.11 ccw(c-911.89,156.11) U16.3@-924.7,143.3 ; U16.2@-935.3,182.7 cw(c-948.11,169.89) -930,169.89 cw(c-911.89,169.89) U16.2@-924.7,182.7
  Bottom Layer w10: Q9.3@-1084.37,236.43 -1033.14,236.43 v1(-984.71,188) -939,188 R76.1@-932,195 ; Q9.3@-1079.55,231.61 cw(c-1067.93,219.98) -1067.93,236.43 cw(c-1067.93,252.87) Q9.3@-1079.55,241.24 ; v1@-989.71,188 ccw(c-1001.79,188) -993.25,196.54 ccw(c-984.71,205.07) v1@-984.71,193 ; v1@-981.18,184.46 cw(c-972.64,175.93) -972.64,188 cw(c-972.64,200.07) v1@-981.18,191.54
NetR43_1: R43.1 U2.6 | length 266.6
  Top Layer w10: U2.6@-1208.75,2594.17 -1142.17,2594.17 -1104,2556 v1(-1104,2543) ; U2.6@-1186.42,2588.86 cw(c-1173.62,2576.06) -1173.62,2594.17 cw(c-1173.62,2612.27) U2.6@-1186.42,2599.47 ; v1@-1107.54,2546.54 ccw(c-1116.07,2555.07) -1104,2555.07 ccw(c-1091.93,2555.07) v1@-1100.46,2546.54
  Bottom Layer w10: R43.1@-1111.21,2519.16 ccw(c-1128.61,2536.56) v1@-1104,2536.56 ; v1@-1107.54,2539.46 cw(c-1116.07,2530.93) -1104,2530.93 cw(c-1091.93,2530.93) v1@-1100.46,2539.46 ; R43.1@-1105,2510 -1104,2511 v1(-1104,2543) ; -1104,2531.73 ccw(c-1086.22,2531.73) R43.1@-1098.79,2519.16
NetR61_1: R61.1 U3.6 | length 312.9
  Top Layer w10: U3.6@-1220.62,1890.14 -1136.57,1890.14 -1106,1859.57 v1(-1106,1836.57) ; U3.6@-1200.32,1884.84 cw(c-1187.52,1872.04) -1187.52,1890.14 cw(c-1187.52,1908.25) U3.6@-1200.32,1895.45 ; v1@-1109.54,1840.11 ccw(c-1118.07,1848.64) -1106,1848.64 ccw(c-1093.93,1848.64) v1@-1102.46,1840.11
  Bottom Layer w10: R61.1@-1111.21,1783.16 ccw(c-1123.78,1795.73) -1106,1795.73 ; v1@-1109.54,1833.04 cw(c-1118.07,1824.5) -1106,1824.5 cw(c-1093.93,1824.5) v1@-1102.46,1833.04 ; -1106,1800.56 ccw(c-1081.39,1800.56) R61.1@-1098.79,1783.16 ; v1(-1106,1836.57) -1106,1775 R61.1@-1105,1774
NetR64_1: R64.1 U4.6 | length 280.4
  Top Layer w10: U4.6@-1220.62,2240.57 -1136.57,2240.57 -1106,2210 v1(-1106,2187) ; U4.6@-1200.32,2235.27 cw(c-1187.52,2222.46) -1187.52,2240.57 cw(c-1187.52,2258.68) U4.6@-1200.32,2245.87 ; v1@-1109.54,2190.54 ccw(c-1118.07,2199.07) -1106,2199.07 ccw(c-1093.93,2199.07) v1@-1102.46,2190.54
  Bottom Layer w10: R64.1@-1111.21,2166.16 ccw(c-1123.78,2178.73) v1@-1106,2178.73 ; v1@-1109.54,2183.46 cw(c-1118.07,2174.93) -1106,2174.93 cw(c-1093.93,2174.93) v1@-1102.46,2183.46 ; v1@-1106,2183.56 ccw(c-1081.39,2183.56) R64.1@-1098.79,2166.16 ; v1(-1106,2187) -1106,2158 R64.1@-1105,2157
NetR65_1: R65.1 U5.6 | length 296.5
  Top Layer w10: U5.6@-1220.62,1539.71 -1136.57,1539.71 -1106,1509.14 v1(-1106,1486.14) ; U5.6@-1200.32,1534.41 cw(c-1187.52,1521.61) -1187.52,1539.71 cw(c-1187.52,1557.82) U5.6@-1200.32,1545.02 ; v1@-1109.54,1489.68 ccw(c-1118.07,1498.21) -1106,1498.21 ccw(c-1093.93,1498.21) v1@-1102.46,1489.68
  Bottom Layer w10: R65.1@-1111.21,1449.16 ccw(c-1123.78,1461.73) -1106,1461.73 ; v1@-1109.54,1482.61 cw(c-1118.07,1474.07) -1106,1474.07 cw(c-1093.93,1474.07) v1@-1102.46,1482.61 ; -1106,1466.56 ccw(c-1081.39,1466.56) R65.1@-1098.79,1449.16 ; v1(-1106,1486.14) -1106,1441 R65.1@-1105,1440
NetR69_1: R69.1 U13.6 | length 277.1
  Top Layer w10: U13.6@-1220.62,1189.29 -1136.57,1189.29 -1106,1158.71 v1(-1106,1135.71) ; U13.6@-1200.32,1183.98 cw(c-1187.52,1171.18) -1187.52,1189.29 cw(c-1187.52,1207.39) U13.6@-1200.32,1194.59 ; v1@-1109.54,1139.25 ccw(c-1118.07,1147.79) -1106,1147.79 ccw(c-1093.93,1147.79) v1@-1102.46,1139.25
  Bottom Layer w10: R69.1@-1111.21,1118.16 ccw(c-1123.78,1130.73) v1@-1106,1130.73 ; v1@-1109.54,1132.18 cw(c-1118.07,1123.64) -1106,1123.64 cw(c-1093.93,1123.64) v1@-1102.46,1132.18 ; v1@-1106,1135.56 ccw(c-1081.39,1135.56) R69.1@-1098.79,1118.16 ; v1(-1106,1135.71) -1106,1110 R69.1@-1105,1109
NetR70_1: R70.1 U14.6 | length 293
  Top Layer w10: U14.6@-1228,485 -1143.95,485 -1113.38,454.43 v1(-1113.38,431.43) ; v1@-1116.91,434.96 ccw(c-1125.45,443.5) -1113.38,443.5 ccw(c-1101.31,443.5) v1@-1109.84,434.96
  Bottom Layer w10: v1@-1116.91,427.89 cw(c-1125.45,419.36) -1113.38,419.36 cw(c-1101.31,419.36) v1@-1109.84,427.89 ; -1113.38,409.69 ccw(c-1088.8,409.69) R70.1@-1104.79,391.03 ; R70.1@-1104,389 -1113.38,398.38 v1(-1113.38,431.43) ccw(c-1070.17,431.43) R70.1@-1098.29,398.62
NetR73_1: R73.1 U17.6 | length 287.6
  Top Layer w10: U17.6@-1220.62,838.86 -1136.57,838.86 -1106,808.29 v1(-1106,785.29) ; U17.6@-1200.32,833.55 cw(c-1187.52,820.75) -1187.52,838.86 cw(c-1187.52,856.96) U17.6@-1200.32,844.16 ; v1@-1109.54,788.82 ccw(c-1118.07,797.36) -1106,797.36 ccw(c-1093.93,797.36) v1@-1102.46,788.82
  Bottom Layer w10: R73.1@-1113.21,757.16 ccw(c-1130.61,774.56) -1106,774.56 ; v1@-1109.54,781.75 cw(c-1118.07,773.21) -1106,773.21 cw(c-1093.93,773.21) v1@-1102.46,781.75 ; R73.1@-1107,748 -1106,749 v1(-1106,785.29) ; -1106,769.73 ccw(c-1088.22,769.73) R73.1@-1100.79,757.16
NetR74_1: R74.1 U18.6 | length 273
  Top Layer w10: U18.6@-1220.62,138 -1136.57,138 -1106,107.43 v1(-1106,84.43) ; U18.6@-1200.32,132.7 cw(c-1187.52,119.89) -1187.52,138 cw(c-1187.52,156.11) U18.6@-1200.32,143.3 ; v1@-1109.54,87.96 ccw(c-1118.07,96.5) -1106,96.5 ccw(c-1093.93,96.5) v1@-1102.46,87.96
  Bottom Layer w10: R74.1@-1111.21,64.16 ccw(c-1126.2,79.15) -1105,79.15 ccw(c-1083.8,79.15) R74.1@-1098.79,64.16 ; v1@-1109.54,80.89 cw(c-1120.49,69.94) R74.1@-1105,69.94 ; v1(-1106,84.43) -1105,83.43 R74.1@-1105,55
NetU1_1: U1.1 U2.7 | length 355
  Top Layer w10: U2.7@-1208.75,2644.17 -1099.83,2644.17 -1053,2691 U1.1@-930,2691 ; U2.7@-1186.42,2638.86 cw(c-1173.62,2626.06) -1173.62,2644.17 cw(c-1173.62,2662.27) U2.7@-1186.42,2649.47 ; U1.1@-950.3,2685.7 ccw(c-963.11,2672.89) -963.11,2691 ccw(c-963.11,2709.11) U1.1@-950.3,2696.3
NetU3_7: U3.7 U7.1 | length 368.2
  Top Layer w10: U3.7@-1220.62,1940.14 -1082.86,1940.14 -1032.86,1990.14 U7.1@-930,1990.14 ; U3.7@-1200.32,1934.84 cw(c-1187.52,1922.04) -1187.52,1940.14 cw(c-1187.52,1958.25) U3.7@-1200.32,1945.45 ; U7.1@-950.3,1984.84 ccw(c-963.11,1972.04) -963.11,1990.14 ccw(c-963.11,2008.25) U7.1@-950.3,1995.45
NetU4_7: U4.7 U8.1 | length 368.2
  Top Layer w10: U4.7@-1220.62,2290.57 -1126.43,2290.57 -1076.43,2340.57 U8.1@-930,2340.57 ; U4.7@-1200.32,2285.27 cw(c-1187.52,2272.46) -1187.52,2290.57 cw(c-1187.52,2308.68) U4.7@-1200.32,2295.87 ; U8.1@-950.3,2335.27 ccw(c-963.11,2322.46) -963.11,2340.57 ccw(c-963.11,2358.68) U8.1@-950.3,2345.87
NetU5_7: U5.7 U9.1 | length 368.2
  Top Layer w10: U5.7@-1220.62,1589.71 -1090.29,1589.71 -1040.29,1639.71 U9.1@-930,1639.71 ; U5.7@-1200.32,1584.41 cw(c-1187.52,1571.61) -1187.52,1589.71 cw(c-1187.52,1607.82) U5.7@-1200.32,1595.02 ; U9.1@-950.3,1634.41 ccw(c-963.11,1621.61) -963.11,1639.71 ccw(c-963.11,1657.82) U9.1@-950.3,1645.02
NetU10_1: U10.1 U13.7 | length 368.2
  Top Layer w10: U13.7@-1220.62,1239.29 -1089.71,1239.29 -1039.71,1289.29 U10.1@-930,1289.29 ; U13.7@-1200.32,1233.98 cw(c-1187.52,1221.18) -1187.52,1239.29 cw(c-1187.52,1257.39) U13.7@-1200.32,1244.59 ; U10.1@-950.3,1283.98 ccw(c-963.11,1271.18) -963.11,1289.29 ccw(c-963.11,1307.39) U10.1@-950.3,1294.59